# EAGLE board TOP_BEE_Brother_1.0v (EAGLE 6.5.0)
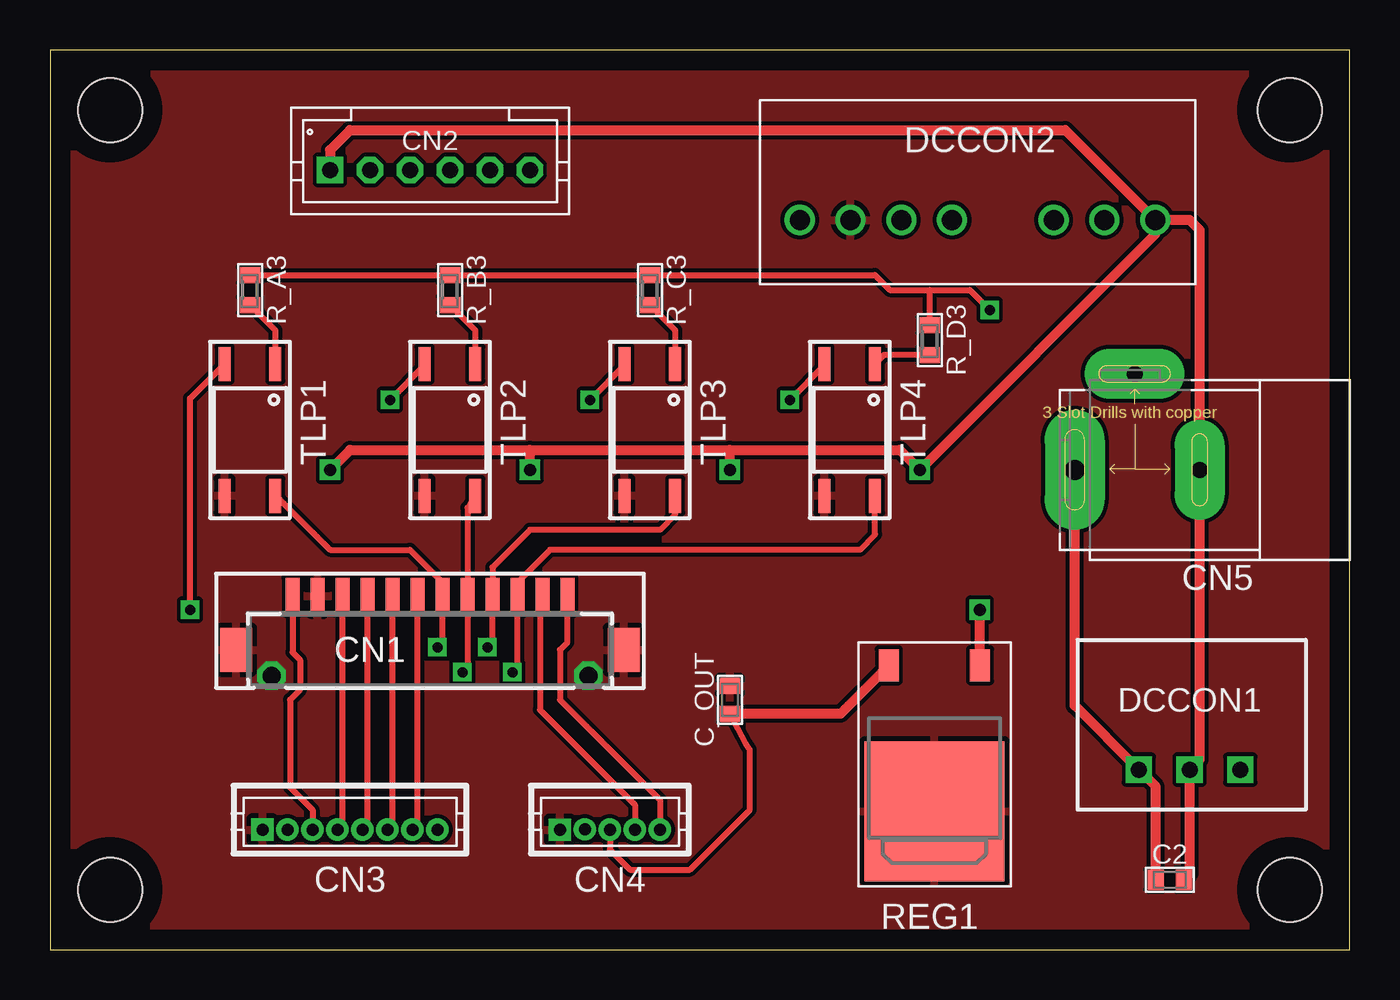
[diagram p0: board, top side]
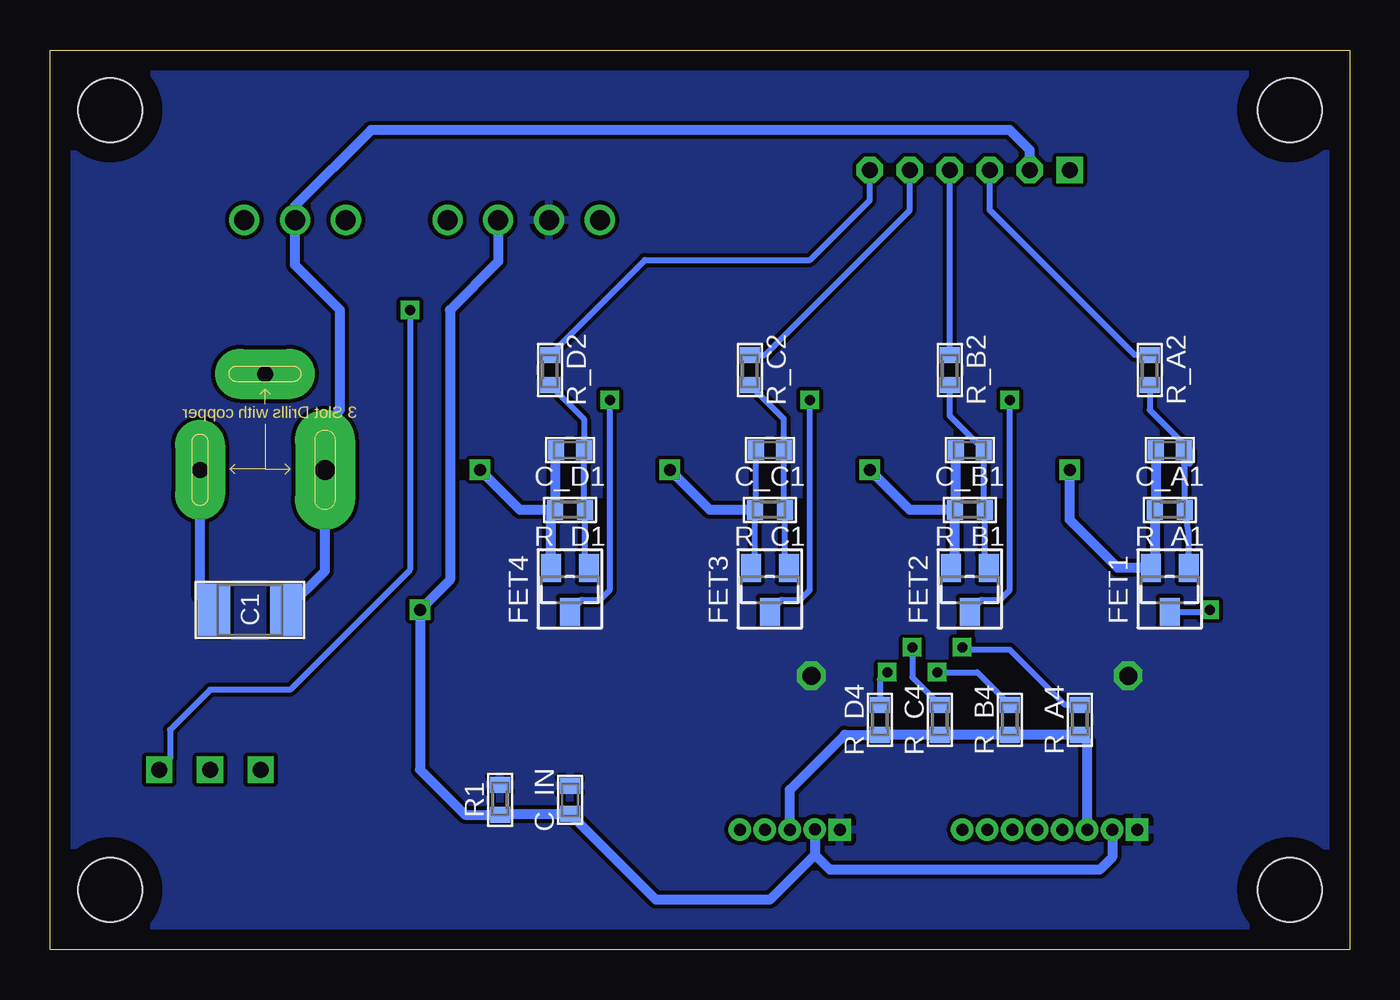
[diagram p1: board, bottom side, seen from below]

Size 65 x 45 mm. Coordinates in mm from the lower left corner, seen from the top.
Outline: 0,0 65,0 65,45 0,45 0,0
Copper layers (1*16): Top 0.035mm / dielectric 1.5mm / Bottom 0.035mm
Design rules "default *": minimum track width 10mil, minimum drill 0.4mm, track to track 8mil, track to pad 8mil, pad to pad 0.01mm, via to via 8mil, smd to smd 8mil, copper to edge 40mil, drill to drill 8mil, minimum pad ring 10mil, minimum via ring 8mil, stop-mask expansion 4mil, vias tented up to drill 0mil, thermal gap 10mil
Net classes: 0 default: width 0.2 mm; 1 24v: width 0.4 mm; 2 10v: width 0.008 mm; 3 24vSig: clearance 0.4 mm to class 0
Holes 3.2 mm at 3,42 62,42 62,3 3,3

## Footprints (pad centres in the part's own frame; a part is rotated, then mirrored left to right if it is on the bottom)
3225 = smd 1.6 x 2.6: P$1 -1.8,0; P$2 1.8,0
1608 = smd 0.8 x 1: P$1 -0.7,0; P$2 0.7,0
DF13C-12P-1.25V = drill 0.9 octagon: G1 -7.925,-1.3; G2 7.925,-1.3 | smd 1.6 x 2.2: M$0 9.7,0; M$1 -9.7,0 | smd 0.7 x 1.8: P$1 -6.875,2.7; P$2 -5.625,2.7; P$3 -4.375,2.7; P$4 -3.125,2.7; P$5 -1.875,2.7; P$6 -0.625,2.7; P$7 0.625,2.7; P$8 1.875,2.7; P$9 3.125,2.7; P$10 4.375,2.7; P$11 5.625,2.7; P$12 6.875,2.7
JST-PA6 = drill 0.8 square: 1 5,0 | drill 0.8 octagon: 2 3,0; 3 1,0; 4 -1,0; 5 -3,0; 6 -5,0
DF13-8P-1.25DSA = drill 0.6 pad 1.016 square: P$1 4.375,0 | drill 0.6 pad 1.016: P$2 3.125,0; P$3 1.875,0; P$4 0.625,0; P$5 -0.625,0; P$6 -1.875,0; P$7 -3.125,0; P$8 -4.375,0
DF13-5P-1.25DSA = drill 0.6 pad 1.016 square: P$1 2.5,0.005 | drill 0.6 pad 1.016: P$2 1.25,-0.005; P$3 0,0; P$4 -1.25,0; P$5 -2.5,0
2DC-0005D = drill 1 pad 3 long: 1 6.25,0 | drill 0.8 pad 2.5 long: 2 0,0; 3 3.25,-4.8
Ｒ－７８Ｅ５．０ = drill 0.8 square: 1 -2.54,0; 2 0,0; 3 2.54,0
SIP8 = drill 1: 1 -17.78,0; 2 -15.24,0; 3 -12.7,0; 5 -7.62,0; 6 -5.08,0; 7 -2.54,0; 8 0,0
SOT23 = smd 1 x 1.4: 1 -0.95,-1.1; 2 0.95,-1.1; 3 0,1.1
1608' = smd 0.8 x 1: 1 -0.75,0; 2 0.75,0
TO252 = smd 1 x 1.6: 1 -2.52,-6.22; 3 2.04,-6.22 | smd 7 x 7: 2 -0.24,1.08
11−4C1 = smd 0.6 x 1.7: 1 -1.27,-3.3; 3 1.27,-3.3; 4 1.27,3.3; 6 -1.27,3.3
JST-PA8 = drill 0.8 square: 1 7,0 | drill 0.8 octagon: 2 5,0; 3 3,0; 4 1,0; 5 -1,0; 6 -3,0; 7 -5,0; 8 -7,0

## Placement (x,y rotation side)
C1  [3225]  55,17 180 bottom
C2  [1608]  56,3.5 0 top
C_A1  [1608]  9,25 180 bottom
C_B1  [1608]  19,25 180 bottom
C_C1  [1608]  29,25 180 bottom
C_D1  [1608]  39,25 180 bottom
C_IN  [1608]  39,7.5 90 bottom
C_OUT  [1608]  34,12.5 90 top
CN1  DF13-12P-1.25V  [DF13C-12P-1.25V]  19,15 0 top
CN2  JST-PA6  [JST-PA6]  19,39 180 top
CN3  DF13-8P-1.25DSA  [DF13-8P-1.25DSA]  15,6 180 top
CN4  DF13-5P-1.25DSA  [DF13-5P-1.25DSA]  28,6 180 top
CN5  2DC-0005X  [2DC-0005D]  57.5,24 180 top
DCCON1  Ｒ－７８Ｅ５．０  [Ｒ－７８Ｅ５．０]  57,9 0 top
DCCON2  RS3  [SIP8]  37.5,36.5 180 top
FET1  2N7002K  [SOT23]  9,18 180 bottom
FET2  2N7002K  [SOT23]  19,18 180 bottom
FET3  2N7002K  [SOT23]  29,18 180 bottom
FET4  2N7002K  [SOT23]  39,18 180 bottom
R1  [1608']  42.5,7.5 270 bottom
R_A1  4.7K  [1608']  9,22 0 bottom
R_A2  10k  [1608']  10,29 90 bottom
R_A3  330  [1608']  10,33 90 top
R_A4  10k  [1608']  13.5,11.5 270 bottom
R_B1  4.7K  [1608']  19,22 0 bottom
R_B2  10K  [1608']  20,29 90 bottom
R_B3  330  [1608']  20,33 90 top
R_B4  10k  [1608']  17,11.5 270 bottom
R_C1  4.7K  [1608']  29,22 0 bottom
R_C2  10K  [1608']  30,29 90 bottom
R_C3  330  [1608']  30,33 90 top
R_C4  10k  [1608']  20.5,11.5 270 bottom
R_D1  4.7K  [1608']  39,22 0 bottom
R_D2  10K  [1608']  40,29 90 bottom
R_D3  330  [1608']  44,30.5 90 top
R_D4  10k  [1608']  23.5,11.5 270 bottom
REG1  NJM2845  [TO252]  44,8 180 top
TLP1  TLP124  [11−4C1]  10,26 180 top
TLP2  TLP124  [11−4C1]  20,26 180 top
TLP3  TLP124  [11−4C1]  30,26 180 top
TLP4  TLP124  [11−4C1]  40,26 180 top
U$1  JST-PA8  [JST-PA8]  4,-6.5 0 top  (outside the outline)

## Library data of the parts
C1 C2 C_A1 C_B1 C_C1 C_D1 C_IN C_OUT = 02_C
CN1 CN3 CN4 = con-hirose-df13
CN2 U$1 = jst-ph
CN5 = marushin
DCCON1 DCCON2 REG1 TLP1-TLP4 = 04_IC
FET1-FET4 = 06_FET
R1 R_A1-R_A4 R_B1-R_B4 R_C1-R_C4 R_D1-R_D4 = 01_R

## Nets
2N7002K: C_A1.P$1 FET1.1 R_A1.2 R_A2.1
+3.3V: C_OUT.P$1 CN1.P$1 CN3.P$3 CN4.P$3 R_A4.2 R_B4.2 R_C4.2 R_D4.2 REG1.3
+5V: C_IN.P$1 CN3.P$2 CN4.P$2 DCCON2.6 R1.2 REG1.1
+24V [24v]: C1.P$1 C2.P$1 CN2.2 CN5.1 DCCON1.1 DCCON2.2
CTS: CN1.P$5 CN3.P$6
DIO1: CN1.P$7 R_A4.1 TLP1.6
DIO2: CN1.P$8 R_B4.1 TLP2.6
DIO3: CN1.P$9 R_C4.1 TLP3.6
DIO4: CN1.P$10 R_D4.1 TLP4.6
DIO11: CN1.P$11 CN4.P$4
DIO12: CN1.P$12 CN4.P$5
GND: C_IN.P$2 C_OUT.P$2 CN1.G1 CN1.G2 CN1.M$0 CN1.M$1 CN1.P$2 CN3.P$1 CN4.P$1 DCCON2.7 R1.1 REG1.2 TLP1.4 TLP2.4 TLP3.4 TLP4.4
GND2 [24v]: C1.P$2 C2.P$2 C_A1.P$2 C_B1.P$2 C_C1.P$2 C_D1.P$2 CN2.1 CN5.2 DCCON1.2 DCCON2.1 FET1.2 FET2.2 FET3.2 FET4.2 R_A1.1 R_B1.1 R_C1.1 R_D1.1
INPUT1 [24vSig]: CN2.3 R_A2.2
INPUT2 [24vSig]: CN2.4 R_B2.2
INPUT3 [24vSig]: CN2.5 R_C2.2
INPUT4 [24vSig]: CN2.6 R_D2.2
N$1: FET2.3 TLP2.3
N$2: FET1.3 TLP1.3
N$3: R_A3.1 TLP1.1
N$4: FET4.3 TLP4.3
N$5: R_B3.1 TLP2.1
N$6: C_B1.P$1 FET2.1 R_B1.2 R_B2.1
N$7: FET3.3 TLP3.3
N$8: R_C3.1 TLP3.1
N$9: C_C1.P$1 FET3.1 R_C1.2 R_C2.1
N$10: R_D3.1 TLP4.1
N$11: C_D1.P$1 FET4.1 R_D1.2 R_D2.1
NC1: CN3.P$8
RTS: CN1.P$6 CN3.P$7
RX: CN1.P$4 CN3.P$5
TX: CN1.P$3 CN3.P$4
V2: DCCON1.3 R_A3.2 R_B3.2 R_C3.2 R_D3.2

## Tracks (layer width: path | path; a pad name or v marks a point on that pad's centre or on a via)
2N7002K
  Bottom 0.3: FET1.1 8.05,20.8 R_A1.2 8.25,23.95 C_A1.P$1 8,24.3 8,25 10,27 R_A2.1
+3.3V
  Top 0.3: C_OUT.P$1 34.8,10.3 35,10 35,7 32,4 29,4 28,5 CN4.P$3 | CN1.P$1 12.12,14.88 12.5,14.5 12.5,13 12,12.5 12,8.12 13.12,7 CN3.P$3
  Top 0.5: REG1.3 39.54,11.8 C_OUT.P$1
  Bottom 0.3: R_A4.2 13.12,10.38 | 23.5,10.5 R_D4.2
  Bottom 0.5: R_A4.2 R_B4.2 R_C4.2 R_D4.2 25.25,10.75 28,8 CN4.P$3 | CN3.P$3 13.12,10.38
+5V  (via drill 0.6)
  Top 0.5: REG1.1 46.5,14.24 v46.5,17
  Bottom 0.3: 26.75,5.75 CN4.P$2
  Bottom 0.5: DCCON2.6 42.58,34.42 45,32 45,18.5 v46.5,17 46.5,9 44.25,6.75 R1.2 42.45,6.8 C_IN.P$1 34.7,2.5 29,2.5 26.75,4.75 | CN3.P$2 11.88,4.62 12.5,4 26,4 26.75,4.75 | CN4.P$2 26.75,4.75
+24V
  Top 0.5: CN5.1 51.25,12.21 DCCON1.1 55.3,8.16 C2.P$1
  Bottom 0.5: C1.P$1 51.25,18.95 CN5.1 51.25,26.25 50.5,27 50.5,32 52.74,34.24 DCCON2.2 52.74,37.2 48.94,41 17,41 16,40 CN2.2
CTS
  Top 0.3: CN3.P$6 17.12,6.25 CN1.P$5
DIO1  (via drill 0.5)
  Top 0.3: TLP1.6 11.3,22.7 14,20 18,20 19.62,18.38 CN1.P$7 19.62,15.38 v19.38,15.12
  Bottom 0.3: R_A4.1 14.25,12.25 17,15 19.25,15 v19.38,15.12
DIO2  (via drill 0.5)
  Top 0.3: TLP2.6 20.88,22.09 CN1.P$8 20.88,14.12 v20.62,13.88
  Bottom 0.3: v20.62,13.88 18.62,13.88 R_B4.1
DIO3  (via drill 0.5)
  Top 0.3: v21.88,15.12 22.12,15.38 CN1.P$9 22.12,19.12 24,21 30.5,21 31.27,21.77 TLP3.6
  Bottom 0.3: v21.88,15.12 21.88,13.62 R_C4.1
DIO4  (via drill 0.5)
  Top 0.3: v23.12,13.88 23.38,14.12 CN1.P$10 23.38,18.38 25,20 40.5,20 41.27,20.77 TLP4.6
  Bottom 0.3: v23.12,13.88 23.5,13.5 R_D4.1
DIO11
  Top 0.3: CN1.P$11 24.5,17.57 24.5,12 29.25,7.25 CN4.P$4
DIO12
  Top 0.3: CN1.P$12 25.88,15.38 25.5,15 25.5,12.5 30.5,7.5 CN4.P$5
GND
  pour Top: 0,45 65,45 65,0 0,0
  pour Bottom: 0,45 65,45 65,0 0,0
GND2  (via drill 0.6)
  Top 0.5: v14,24 15,25 24,25 | 24,25 34,25 | 34,25 42.5,25 v43.5,24 55.28,35.78 DCCON2.1 | v24,24 24,25 | v34,24 34,25 | DCCON2.1 57,36.5 57.5,36 CN5.2 57.5,9.5 DCCON1.2 57,3.8 C2.P$2 | DCCON2.1 50.78,41 15,41 14,40 CN2.1
  Bottom 0.3: FET3.2 29.75,19.1 R_C1.1 29.7,22 C_C1.P$2
  Bottom 0.5: C_A1.P$2 9.7,22.05 R_A1.1 9.75,19.3 FET1.2 11.6,19.1 14,21.5 v14,24 | FET2.2 19.75,19.3 R_B1.1 | R_B1.1 19.7,22.05 C_B1.P$2 | FET4.2 39.95,21.8 R_D1.1 39.75,22.25 | C_D1.P$2 39.75,24.95 39.75,22.25 | C1.P$2 57.5,17.7 CN5.2 | R_C1.1 32,22 v34,24 | 39.75,22.25 40,22 41.5,22 v43.5,24 | R_B1.1 22,22 v24,24
INPUT1
  Bottom 0.3: R_A2.2 10.75,29.75 18,37 CN2.3
INPUT2
  Bottom 0.3: R_B2.2 CN2.4
INPUT3
  Bottom 0.3: R_C2.2 29.25,29.75 22,37 CN2.5
INPUT4
  Bottom 0.3: R_D2.2 35.25,34.5 27,34.5 24,37.5 CN2.6
N$1  (via drill 0.5)
  Top 0.3: v17,27.5 18.73,29.23 TLP2.3
  Bottom 0.3: FET2.3 18.4,17.5 17.5,17.5 17,18 v17,27.5
N$2  (via drill 0.5)
  Top 0.3: v7,17 7,27.57 TLP1.3
  Bottom 0.3: FET1.3 7.1,16.9 v7,17
N$3
  Top 0.3: R_A3.1 11.27,30.98 TLP1.1
N$4  (via drill 0.5)
  Top 0.3: TLP4.3 38.73,29.23 v37,27.5
  Bottom 0.3: FET4.3 38.4,17.5 37.5,17.5 37,18 v37,27.5
N$5
  Top 0.3: R_B3.1 21.27,30.98 TLP2.1
N$6
  Bottom 0.3: FET2.1 18.25,19.3 R_B1.2 18.3,22.05 C_B1.P$1 20,26.7 R_B2.1
N$7  (via drill 0.5)
  Top 0.3: v27,27.5 28.73,29.23 TLP3.3
  Bottom 0.3: FET3.3 28.4,17.5 27.5,17.5 27,18 v27,27.5
N$8
  Top 0.3: R_C3.1 31.27,30.98 TLP3.1
N$9
  Bottom 0.3: FET3.1 28.3,19.35 28.25,19.35 R_C1.2 28.3,22 C_C1.P$1 28.3,26.55 R_C2.1
N$10
  Top 0.3: R_D3.1 41.72,29.75 TLP4.1
N$11
  Bottom 0.3: FET4.1 38.25,19.3 R_D1.2 38.3,22.05 C_D1.P$1 38.3,26.55 R_D2.1
RTS
  Top 0.3: CN3.P$7 18.38,6.25 CN1.P$6
RX
  Top 0.3: CN3.P$5 15.88,6.25 CN1.P$4
TX
  Top 0.3: CN3.P$4 14.62,6.25 CN1.P$3
V2  (via drill 0.5)
  Top 0.3: R_A3.2 R_B3.2 R_C3.2 41.25,33.75 42,33 44,33 | 44,33 46,33 v47,32 | R_D3.2 44,33
  Bottom 0.3: v47,32 47,19 53,13 57,13 59,11 59,9.54 DCCON1.3